# Altium PCB IMX6WBED.PcbDoc (part 4 of 10)
Units mil, origin at the board's own origin, x right, y up, seen from the top; angles counter-clockwise.
Board outline 3318.23 x 4815.16 mil, 6 copper layers (Top Layer, L2_GND_1, L3_INT_1, L6_INT_2, L7_PWR_2, Bottom Layer), stack 27.7 mil thick; 504 components, 400 nets, 2357 pads, 1199 vias.
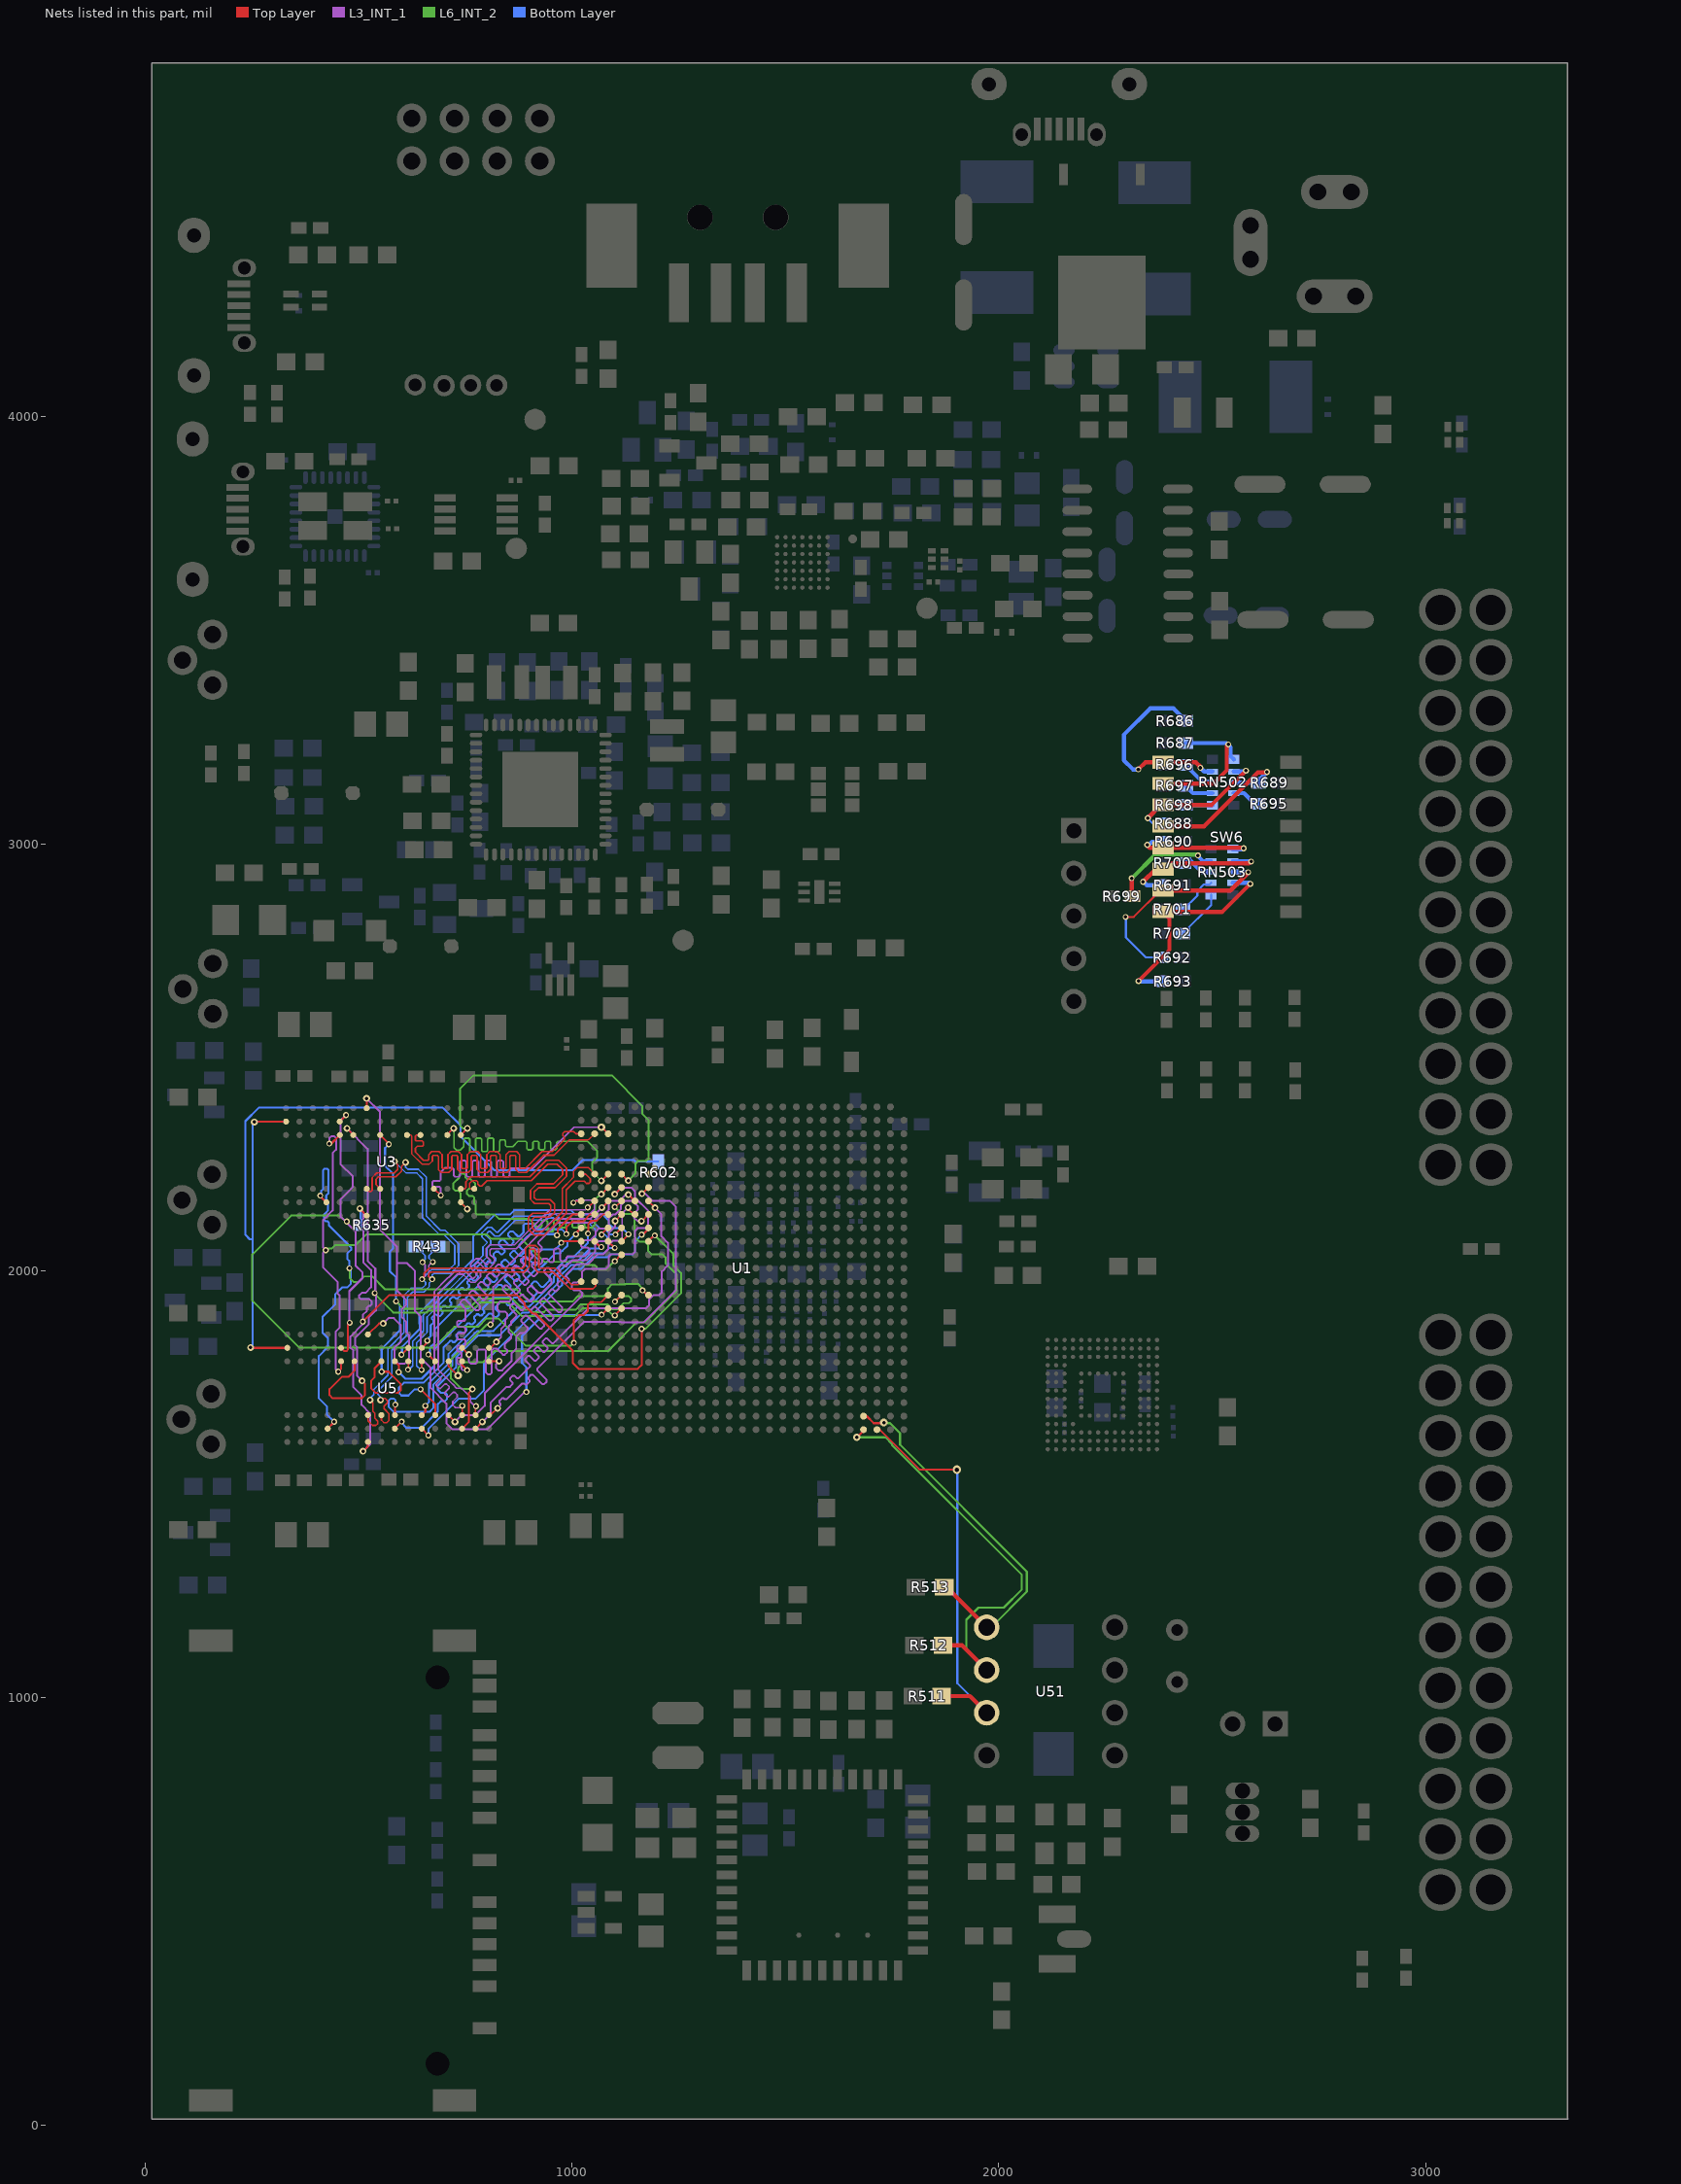
[diagram p8: the nets of this part, all layers, seen from the top]

## Via types
v1: diameter 14, hole 8, Top Layer to Bottom Layer, 296 vias
v2: diameter 14, hole 8, Top Layer to Bottom Layer, tented both sides, 244 vias
v3: diameter 20, hole 10, Top Layer to Bottom Layer, 221 vias
v4: diameter 20, hole 10, Top Layer to Bottom Layer, tented both sides, 112 vias
v5: diameter 18, hole 8, Top Layer to Bottom Layer, tented both sides, 74 vias
v6: diameter 12, hole 6, Top Layer to Bottom Layer, tented both sides, 60 vias
v7: diameter 16, hole 8, Top Layer to Bottom Layer, 59 vias
v8: diameter 30, hole 15, Top Layer to Bottom Layer, 33 vias
v9: diameter 40, hole 20, Top Layer to Bottom Layer, 16 vias
v10: diameter 30, hole 15, Top Layer to Bottom Layer, tented both sides, 16 vias
v11: diameter 18, hole 8, Top Layer to Bottom Layer, 16 vias
v12: diameter 12, hole 6, Top Layer to Bottom Layer, 13 vias
v13: diameter 16, hole 8, Top Layer to Bottom Layer, tented both sides, 8 vias
v14: diameter 80, hole 40, Top Layer to Bottom Layer, 5 vias
v15: diameter 14, hole 6, Top Layer to Bottom Layer, tented both sides, 4 vias
v16: diameter 50, hole 30, Top Layer to Bottom Layer, 3 vias
v17: diameter 16, hole 10, Top Layer to Bottom Layer, 3 vias
v18: diameter 25, hole 15, Top Layer to Bottom Layer, tented both sides, 3 vias
v19: diameter 35, hole 20, Top Layer to Bottom Layer, tented both sides, 3 vias
v20: diameter 10, hole 6, Top Layer to Bottom Layer, 3 vias
v21: diameter 18, hole 10, Top Layer to Bottom Layer, tented both sides, 2 vias
v22: diameter 80, hole 45, Top Layer to Bottom Layer, 1 vias
v23: diameter 40, hole 20, Top Layer to Bottom Layer, tented both sides, 1 vias
v24: diameter 11, hole 6, Top Layer to Bottom Layer, tented both sides, 1 vias
v25: diameter 13, hole 6, Top Layer to Bottom Layer, tented both sides, 1 vias
v26: diameter 14, hole 6, Top Layer to Bottom Layer, 1 vias

## Nets (pads, with @x,y where several pads share a name; then routed paths per layer and width w, separated by ;. In a path a pad name is that pad's centre, name@x,y a point inside that pad or via, vN(x,y) a via of type N, cw(c..) or ccw(c..) an arc to the next point about the centre after c; other vN are vias at no path point) (continued)
DRAM_D14: U1.AB6 U3.C3 | length 827.3
  Top Layer w4.5: U3.C3@739.48,2317.91 739.48,2318.16 v7(754.84,2333.52) ; U1.AB6@1116.05,2226.42 v7@1129.18,2213.29
  L6_INT_2 w4.5: v7@754.58,2333.65 744.24,2333.65 738.09,2339.8 738.09,2426.69 768.82,2457.42 1093.18,2457.42 1164.4,2386.2 1164.4,2367.63 1179.54,2352.49 1179.54,2262.48 1174.22,2257.16 1155.33,2257.16 1148.61,2250.44 1148.61,2227.95 v7(1131.71,2211.05)
DRAM_D15: U1.AC7 U3.C8 | length 827.3
  Top Layer w4.5: U3.C8@739.48,2160.43 739.48,2160.05 v7(754.73,2144.8) ; v7@1069.18,2179.55 U1.AC7@1084.56,2194.92
  L6_INT_2 w4.5: v7(754.73,2144.8) 738.79,2160.74 738.79,2182.45 733.55,2187.69 726.25,2187.69 721.6,2192.34 721.6,2204.08 735.55,2218.03 735.55,2223.08 740.27,2227.8 746.33,2227.8 750.58,2223.55 750.58,2218.82 754.56,2214.84 762.19,2214.84 773.41,2203.62 773.41,2196.28 769.09,2191.96 757.86,2191.96 753.92,2188.02 753.92,2179.86 758.32,2175.46 766.28,2175.46 771.1,2170.64 771.1,2158.01 774.07,2155.04 774.07,2134.72 777.11,2131.68 810.88,2131.68 ; 810.9,2131.7 818.88,2131.7 829.36,2121.22 899.54,2121.22 919.61,2101.15 925.63,2101.15 929.16,2104.68 929.16,2114.47 933.01,2118.32 939.04,2118.32 942.73,2114.63 942.73,2095.05 942.54,2094.86 945.44,2091.96 954.14,2091.96 957.04,2094.86 957.04,2116.07 959.94,2118.97 968.64,2118.97 971.54,2116.07 971.54,2104.05 974.44,2101.15 983.14,2101.15 986.04,2104.05 986.04,2120.93 988.94,2123.83 997.64,2123.83 1000.54,2120.93 1000.54,2104.05 1003.44,2101.15 1012.14,2101.15 1015.04,2104.05 1015.04,2121.18 1017.94,2124.08 1026.64,2124.08 1029.54,2121.18 1029.54,2104.05 1032.44,2101.15 1046.59,2101.15 1053.97,2108.53 1053.97,2115.23 1061.36,2122.62 1061.36,2132.84 1053.97,2140.23 1053.97,2166.61 1066.68,2179.32 v7(1068.78,2179.32)
DRAM_D16: U1.AB7 U5.D7 | length 960.9
  Top Layer w4.5: U5.D7@710.98,1661.92 710.98,1661.14 v7(725.82,1646.3) ; v7@1100.43,2179.3 U1.AB7@1116.05,2194.92
  L3_INT_1 w4.5: v7(725.82,1646.3) 741.48,1661.96 773.83,1661.96 795.36,1683.5 795.36,1712.95 1023.17,1940.76 1023.17,1949.02 1017.39,1954.8 1003.85,1954.8 999.45,1959.2 999.45,1968.57 1003.87,1972.99 1012.46,1972.99 1023.06,1983.59 1023.06,1996.63 1030.51,2004.08 1078.23,2004.08 1086.39,2012.24 1086.39,2033.26 1092.2,2039.07 1142.37,2039.07 1147.8,2044.5 1147.8,2070 ; v7(1099.99,2179.51) 1115.11,2194.63 1139.1,2194.63 1147.47,2186.26 1147.47,2171.23 1178.51,2140.19 1178.51,2105.09 1173.35,2099.93 1153.95,2099.93 1147.77,2093.75 1147.77,2071.01 1147.9,2070.88
DRAM_D17: U1.AA8 U5.C8 | length 960.6
  Top Layer w4.5: U5.C8@742.48,1630.43 758.46,1646.41 758.46,1714.72 v7(766.66,1722.92) ; v7@1132.43,2178.55 U1.AA8@1147.55,2163.43
  L3_INT_1 w4.5: v1@808.11,1874.49 815.69,1882.07 815.69,1961.77 845.23,1991.31 849.34,1991.31 855.06,1985.59 859.16,1985.59 865.31,1991.74 865.31,1995.84 859.59,2001.57 859.59,2005.67 865.74,2011.82 869.84,2011.82 876.62,2005.05 880.72,2005.05 886.87,2011.2 886.87,2015.3 880.09,2022.07 880.09,2026.17 886.25,2032.33 890.35,2032.33 897.12,2025.55 901.22,2025.55 907.37,2031.7 907.37,2035.81 900.6,2042.58 900.6,2046.68 906.75,2052.83 910.85,2052.83 919.17,2044.52 924.39,2044.52 929.25,2049.38 929.25,2054.94 921.11,2063.09 921.11,2067.19 966.68,2112.76 1047.38,2112.76 1067.72,2133.1 1075.89,2133.1 1085.77,2142.98 1085.77,2158.43 1090.9,2163.56 1110.17,2163.56 1125.04,2178.43 v7(1131.93,2178.43)
  L6_INT_2 w4.5: v7(766.66,1722.92) 741.44,1722.92 716.69,1747.67 716.69,1792.53 800.35,1873.88 v1@812.08,1873.88
  other v1: 808.76,1873.91
DRAM_D18: U1.AB9 U5.C2 | length 961.9
  Top Layer w4.5: U5.C2@742.48,1819.4 v7@758.12,1803.76 ; v7@1100.98,2116.86 U1.AB9@1116.05,2131.93
  L3_INT_1 w4.5: v7(758.47,1803.76) 758.47,1786.88 762.49,1782.86 773.82,1782.86 778.01,1787.05 778.01,1812.11 781.16,1815.26 795.3,1815.26 798.43,1812.13 798.43,1761.62 802.46,1757.59 808.74,1757.59 812.14,1760.99 812.14,1797.39 ; 812.18,1797.42 812.18,1808.35 812.22,1808.39 812.22,1814.1 815.78,1817.66 823.46,1817.66 827.94,1813.18 838.07,1803.05 842.17,1803.05 848.32,1809.2 848.32,1813.31 841.98,1819.65 841.98,1827.22 857.31,1842.55 857.31,1850.96 851.93,1856.34 851.93,1869.17 857.31,1874.55 857.31,1881.06 869.75,1893.5 869.75,1897.6 854.59,1912.77 854.59,1916.87 860.74,1923.02 864.84,1923.02 880,1907.86 884.11,1907.86 890.26,1914.01 890.26,1918.11 875.09,1933.27 875.09,1937.37 881.25,1943.53 885.35,1943.53 900.51,1928.36 904.61,1928.36 910.76,1934.51 910.76,1938.61 895.6,1953.78 895.6,1957.88 901.75,1964.03 905.85,1964.03 921.02,1948.87 929.41,1948.87 951.78,1971.24 951.78,1979.63 934.66,1996.74 934.66,2000.84 940.82,2006.99 944.92,2006.99 962.03,1989.88 966.13,1989.88 972.28,1996.03 972.28,2000.13 968.89,2003.53 968.89,2007.63 975.04,2013.78 979.14,2013.78 982.53,2010.39 986.64,2010.39 1000.7,2024.45 1033.92,2024.45 1054.72,2045.25 1054.72,2061.7 1062.39,2069.37 1078.84,2069.37 1081.36,2071.89 ; 1081.4,2071.89 1086.16,2076.65 1086.16,2089.11 1100.9,2103.85 v7(1100.9,2116.46)
DRAM_D19: U1.Y9 U5.A2 | length 960.6
  Top Layer w4.5: U5.A2@805.47,1819.4 808.75,1819.4 v7(822.74,1833.39) ; v7@1164.03,2116.92 U1.Y9@1179.05,2131.93
  L3_INT_1 w4.5: v7(822.74,1833.39) 833.96,1844.61 833.96,1863.89 843.75,1873.68 843.75,1884.94 848.47,1889.66 848.47,1899.57 843.92,1904.12 831.11,1904.12 825.68,1909.55 825.68,1921.94 832.15,1928.41 853.4,1928.41 857.1,1932.11 857.1,1936.21 837.51,1955.8 837.51,1959.9 843.66,1966.06 847.76,1966.06 859.85,1953.96 867.36,1946.46 871.46,1946.46 877.61,1952.62 877.61,1956.72 863.77,1970.56 863.77,1974.66 869.92,1980.81 874.02,1980.81 880.36,1974.47 887.86,1966.97 891.96,1966.97 898.12,1973.12 898.12,1977.22 885.32,1990.02 885.32,1994.12 891.47,2000.27 895.57,2000.27 900.87,1994.98 908.37,1987.48 912.47,1987.48 918.62,1993.63 918.62,1997.73 905.83,2010.52 905.83,2014.62 911.98,2020.78 916.08,2020.78 921.37,2015.48 925.95,2015.48 929.61,2019.14 929.61,2024.87 933.24,2028.5 940.51,2028.5 948.17,2020.84 955.02,2020.84 957.82,2023.64 957.82,2049.09 960.72,2051.99 969.42,2051.99 972.32,2049.09 972.32,2025.68 975.22,2022.78 983.92,2022.78 986.82,2025.68 986.82,2030.55 989.72,2033.45 1030.19,2033.45 1041,2044.25 1041,2049.95 1036.5,2054.45 1024.64,2054.45 1021.16,2057.93 1021.16,2067.83 1024.75,2071.42 1042.71,2071.42 1055.48,2084.2 1055.48,2091.9 1062.84,2099.26 1081.64,2099.26 1085.8,2103.42 1085.8,2122.21 1095.45,2131.87 1101.8,2131.87 1114.74,2144.82 1114.74,2153.7 1124.43,2163.39 1141.64,2163.39 1149.17,2155.86 1154.42,2150.6 1154.42,2143.28 1144.92,2133.78 1144.92,2124.86 1153.77,2116.01 v7(1162.81,2116.01)
DRAM_D20: U1.Y7 U5.A7 | length 961.4
  Top Layer w4.5: U5.A7@805.47,1661.92 809.36,1661.92 v7(825.63,1678.19) ; v7@1164.15,2180.61 1178.46,2194.92 U1.Y7@1179.05,2194.92
  L3_INT_1 w4.5: v7@825.37,1678.19 v7@825.5,1678.32 ; v7(825.63,1678.19) 832.19,1684.75 832.19,1688.85 829.93,1691.11 829.93,1695.22 836.08,1701.37 840.18,1701.37 842.44,1699.11 846.55,1699.11 883.46,1736.02 887.56,1736.02 889.82,1733.75 893.92,1733.75 900.07,1739.91 900.07,1744.01 897.81,1746.27 897.81,1750.37 903.96,1756.52 908.06,1756.52 930.39,1734.2 934.49,1734.2 940.64,1740.35 940.64,1744.45 918.32,1766.78 918.32,1770.88 1027.03,1879.6 1027.98,1880.54 1114.33,1880.54 1115.28,1879.59 1155.48,1879.59 1155.54,1879.53 1168.5,1879.53 1243.61,1954.64 1243.61,2149.81 1229.81,2163.61 1205.31,2163.61 1205.15,2163.77 1188.11,2163.77 1170.67,2181.21 v7@1162.01,2181.21
  other v7: 1163.47,2180.75
DRAM_D21: U1.Y8 U5.B8 | length 960.5
  Top Layer w4.5: U5.B8@773.97,1630.43 774.63,1630.43 v7(790.07,1645.87) ; U1.Y8@1179.05,2163.43 1179.05,2163.01 v7@1193.76,2148.3
  L3_INT_1 w4.5: v7(790.07,1645.87) v7@790.8,1646.6 ; v7@790.8,1643.36 v7@790.8,1646.6 ; v7(1194.36,2147.58) 1209.27,2132.67 1209.27,2081 1224.83,2065.44 1224.83,2012.79 1210.44,1998.4 1210.53,1998.31 1210.53,1949.55 1204.02,1943.04 1191.18,1943.04 1181.04,1932.9 1181.04,1920.06 1172.92,1911.94 1038.23,1911.94 956.8,1830.51 952.7,1830.51 941.81,1841.39 937.71,1841.39 931.56,1835.24 931.56,1831.14 942.45,1820.26 942.45,1816.16 936.29,1810 932.19,1810 921.31,1820.89 917.21,1820.89 911.06,1814.74 911.06,1810.63 921.94,1799.75 921.94,1795.65 915.79,1789.5 911.69,1789.5 900.8,1800.38 896.7,1800.38 890.55,1794.23 890.55,1790.13 901.43,1779.24 901.43,1775.14 874.78,1748.49 870.67,1748.49 864.94,1754.22 860.84,1754.22 854.69,1748.07 854.69,1743.97 860.42,1738.23 860.42,1734.13 854.54,1728.25 846.32,1728.25 809.06,1690.99 809.06,1664.86 v7@790.8,1646.6
DRAM_D22: U1.AC8 U5.C3 | length 960.2
  Top Layer w4.5: U5.C3@742.48,1787.91 742.48,1778.99 v1(754.17,1767.3) ; v7@1070.13,2147.01 1084.56,2161.44 U1.AC8@1084.56,2163.43
  L3_INT_1 w4.5: v1@750.96,1767.05 743.59,1767.05 740.66,1769.98 740.66,1778.48 737.76,1781.38 733.56,1781.38 730.66,1784.28 730.66,1792.98 733.56,1795.88 737.76,1795.88 740.66,1798.78 740.66,1807.48 737.76,1810.38 733.56,1810.38 730.66,1813.28 730.66,1821.98 733.56,1824.88 747.76,1824.88 750.66,1827.78 750.66,1836.48 747.76,1839.38 733.56,1839.38 730.66,1842.28 730.66,1850.98 733.56,1853.88 747.76,1853.88 750.66,1856.78 750.66,1865.48 747.76,1868.38 733.56,1868.38 730.66,1871.28 730.66,1879.98 733.56,1882.88 747.76,1882.88 750.66,1885.78 750.66,1910.5 745.7,1915.47 738.59,1922.57 738.59,1926.67 744.74,1932.82 748.84,1932.82 759.65,1922.01 770.46,1911.2 774.55,1907.12 780.03,1907.12 784.61,1911.7 784.61,1917.57 759.1,1943.08 759.1,1947.18 765.25,1953.33 769.35,1953.33 780.16,1942.52 790.97,1931.71 795.07,1931.71 801.22,1937.86 801.22,1941.96 779.6,1963.58 779.6,1967.68 785.76,1973.84 789.86,1973.84 798.62,1965.08 802.72,1965.08 808.87,1971.23 808.87,1975.33 800.11,1984.09 800.11,1988.19 806.26,1994.34 810.36,1994.34 819.12,1985.58 823.22,1985.58 829.38,1991.74 829.38,1995.84 820.62,2004.6 820.62,2008.7 826.77,2014.85 830.87,2014.85 839.63,2006.09 843.73,2006.09 959.4,2121.76 1043.03,2121.76 1064.49,2143.22 1069.94,2143.22 v7(1069.94,2148.01)
DRAM_D23: U1.AA9 U5.A3 | length 960.7
  Top Layer w4.5: U5.A3@805.47,1787.91 828.76,1787.91 v7(829.05,1788.2) ; v7@1130.11,2146.5 1144.68,2131.93 U1.AA9@1147.55,2131.93
  L3_INT_1 w4.5: v7@827.14,1788.14 827.67,1788.14 v7@828.39,1788.86 ; v7(829.05,1788.2) 821.81,1780.96 821.81,1772.34 827.41,1766.74 836.27,1766.74 858.79,1789.26 858.79,1806.95 869.21,1817.37 869.21,1845.58 869.43,1845.58 877.44,1853.59 887.63,1853.59 895.83,1861.79 895.83,1867.44 880.88,1882.39 880.88,1885.92 889.73,1894.77 893.84,1894.77 910.95,1877.66 924,1864.61 928.75,1864.61 934.3,1870.16 934.3,1874.82 904.09,1905.03 904.09,1909.13 910.24,1915.28 914.34,1915.28 945.71,1883.91 951.87,1883.91 956.19,1888.23 956.19,1893.94 924.59,1925.53 924.59,1929.63 930.75,1935.79 934.85,1935.79 967.38,1903.25 972.94,1903.25 977.18,1907.49 977.18,1913.96 945.1,1946.04 945.1,1950.14 951.25,1956.29 955.35,1956.29 959.16,1952.48 963.27,1952.48 969.42,1958.63 969.42,1962.74 965.61,1966.55 965.61,1970.65 971.76,1976.8 975.86,1976.8 982.18,1970.48 986.28,1970.48 992.43,1976.63 992.43,1980.73 986.11,1987.05 986.11,1991.15 1010.41,2015.45 1037.67,2015.45 1060.86,2038.64 1073.34,2038.64 1084.96,2050.26 1084.96,2059.71 1095.21,2069.96 1112.47,2069.96 1117.33,2074.82 1117.33,2109.77 ; 1117.35,2109.79 1117.35,2134.26 v7(1131.11,2148.02)
DRAM_D24: U1.AE9 U5.E3 | length 806.3
  Top Layer w4.7: v1(663.57,1803.69) 663.7,1803.69 U5.E3@679.49,1787.91 ; v1(964.86,2083.24) 964.86,2079.66 967.79,2082.59 966.51,2082.59 966.51,2096.8 1001.65,2131.93 U1.AE9@1021.57,2131.93
  Bottom Layer w4.7: v1@665.21,1805.13 665.85,1805.13 667.05,1806.33 667.05,1819.91 678.18,1831.04 678.18,1862.79 703.28,1887.89 736.93,1921.54 741.09,1921.54 751.71,1910.93 755.86,1910.93 762.1,1917.16 762.1,1921.32 751.49,1931.93 751.49,1936.09 757.72,1942.33 761.88,1942.33 772.5,1931.71 776.65,1931.71 782.89,1937.95 782.89,1942.11 772.27,1952.72 772.27,1956.88 778.51,1963.12 782.67,1963.12 793.28,1952.5 797.44,1952.5 803.68,1958.74 803.68,1962.9 793.06,1973.51 793.06,1977.67 799.3,1983.91 803.46,1983.91 814.07,1973.29 818.23,1973.29 824.47,1979.53 824.47,1983.69 813.85,1994.3 813.85,1998.46 820.09,2004.7 824.25,2004.7 834.86,1994.08 839.02,1994.08 845.26,2000.32 845.26,2004.48 834.64,2015.09 834.64,2019.25 840.88,2025.48 845.04,2025.48 855.65,2014.87 859.81,2014.87 866.05,2021.11 866.05,2025.26 855.43,2035.88 855.43,2040.04 861.67,2046.27 865.82,2046.27 876.44,2035.66 880.6,2035.66 886.83,2041.9 886.83,2046.05 876.22,2056.67 876.22,2060.83 884.53,2069.14 894.93,2079.54 900.13,2084.73 901.2,2085.81 960.68,2085.81 v1@966.68,2079.81
DRAM_D25: U1.Y10 U5.F8 | length 806.3
  Top Layer w4.7: U5.F8@647.99,1630.43 v1@663.6,1614.82 ; v1@1165.27,2084.04 1179.05,2097.82 U1.Y10@1179.05,2100.44
  Bottom Layer w4.5: v1(663.6,1614.42) 663.6,1629.67 734.2,1700.27 773.32,1700.27 793.94,1720.89 793.94,1783.62 955.07,1944.75 955.07,1944.89 976.35,1966.17 976.35,1978.86 1001.37,2003.88 1020.9,2003.88 1048.96,2031.94 1083.46,2031.94 1090.34,2038.82 1142.59,2038.82 1147.85,2044.08 1147.85,2069.11 v1(1163.18,2084.44)
DRAM_D26: U1.AE11 U5.H3 | length 806.8
  Top Layer w4.7: U5.H3@585,1787.91 593.92,1778.99 v1(593.92,1762.37) ; v1@970.9,2063.86 974.95,2063.86 980.03,2068.94 U1.AE11@1021.57,2068.94
  Bottom Layer w4.7: v1@594.39,1762.84 609.99,1747.24 647.82,1747.24 677.42,1776.84 677.42,1817.16 690.03,1829.77 ; 690.03,1829.78 710.46,1850.21 ; 710.5,1850.21 721.09,1860.8 721.17,1860.8 826.87,1966.5 834.55,1966.5 845.41,1955.64 849.57,1955.64 855.81,1961.88 855.81,1966.04 842.58,1979.26 842.58,1983.41 848.82,1989.65 852.98,1989.65 866.2,1976.43 870.36,1976.43 876.59,1982.67 876.59,1986.83 863.37,2000.05 863.37,2004.2 869.61,2010.44 873.77,2010.44 886.99,1997.22 891.15,1997.22 897.38,2003.46 897.38,2007.61 884.16,2020.83 884.16,2024.99 890.4,2031.23 894.56,2031.23 911.98,2013.81 916.14,2013.81 922.37,2020.05 922.37,2024.2 904.95,2041.62 904.95,2045.78 909.44,2050.27 961.36,2050.27 974.95,2063.86 v1@970.9,2063.86
  other v1: 974.83,2065.66
DRAM_D27: U1.AB11 U5.G2 | length 806.7
  Top Layer w4.7: v1@600.72,1803.63 U5.G2@616.49,1819.4 ; U1.AB11@1116.05,2068.94 v1@1131.78,2084.67
  Bottom Layer w4.7: v1@601.73,1803.63 601.73,1821.96 642.9,1863.13 642.9,1875.54 ; 642.49,1888.71 642.49,1901.12 768.26,2026.89 768.26,2080.18 819.59,2131.51 854.06,2131.51 864.24,2141.69 997.83,2141.69 1007.26,2132.26 1031.28,2132.26 1031.37,2132.17 1071.39,2132.17 1077.47,2126.09 1077.53,2126.09 1084.76,2118.86 1084.76,2118.8 1085.61,2117.95 1085.61,2110.75 1096.28,2100.08 1117.61,2100.08 v1(1132.12,2085.57) ; 642.58,1875.86 642.58,1888.62
  other v1: 600.13,1803.63
DRAM_D28: U1.AC9 U5.F7 | length 806.3
  Top Layer w3: U1.AC9@1083.28,2131.93 U1.AC9@1084.56,2131.93
  Top Layer w3.8: 1054.38,2117.08 1057.88,2117.08 1072.73,2131.93 U1.AC9@1083.28,2131.93
  Top Layer w4.7: U5.F7@647.99,1661.92 656.33,1670.26 v1(656.33,1683.77) ; v1@1038.06,2089.57 1038.06,2110.04 1045.1,2117.08 1054.38,2117.08
  Bottom Layer w4.7: v1(656.33,1683.77) 664.64,1692.08 664.64,1735.98 710.15,1781.49 710.15,1804.54 776.14,1870.53 776.58,1870.53 805.96,1899.9 810.11,1899.9 818.87,1891.15 823.03,1891.15 829.27,1897.38 829.27,1901.54 820.51,1910.3 820.51,1914.46 834.02,1927.97 843.89,1927.97 846.83,1925.03 846.83,1921.51 849.77,1918.57 858.59,1918.57 861.53,1921.51 861.53,1934.43 864.47,1937.37 873.29,1937.37 876.23,1934.43 876.23,1930.91 879.17,1927.97 898.28,1927.97 917.89,1947.58 917.89,1951.74 905.12,1964.51 905.12,1968.66 911.36,1974.9 915.52,1974.9 928.28,1962.13 932.44,1962.13 947.75,1977.44 947.75,1989.16 989.96,2031.37 1002.99,2031.37 1016,2044.38 1016,2044.44 1037.37,2065.81 v1(1037.37,2087.18) ; v1@657.08,1682.59 v1@657.29,1682.81
DRAM_D29: U1.AD9 U5.F2 | length 806
  Top Layer w4.5: v1(986.86,2086.1) 986.86,2101.42 1001.8,2116.36 1027.1,2116.36 1042.67,2131.93 U1.AD9@1053.06,2131.93
  Top Layer w4.7: U5.F2@647.99,1819.4 647.99,1819.63 v1@664.33,1835.97
  Bottom Layer w4.7: v1@665.34,1836.43 665.34,1843.46 668.98,1847.1 668.98,1872.28 675.66,1878.96 675.66,1883.12 671.93,1886.85 671.93,1891 678.17,1897.24 682.33,1897.24 686.05,1893.51 690.21,1893.51 696.45,1899.75 696.45,1903.91 692.72,1907.63 692.72,1911.79 698.96,1918.03 703.11,1918.03 706.84,1914.3 711,1914.3 717.24,1920.54 717.24,1924.7 713.51,1928.42 713.51,1932.58 719.75,1938.82 723.9,1938.82 727.63,1935.09 731.79,1935.09 738.03,1941.33 738.03,1945.48 734.3,1949.21 734.3,1953.37 740.54,1959.61 744.69,1959.61 748.42,1955.88 752.58,1955.88 758.82,1962.12 758.82,1966.27 755.09,1970 755.09,1974.16 761.32,1980.4 765.48,1980.4 769.21,1976.67 773.37,1976.67 779.6,1982.9 779.6,1987.06 775.88,1990.79 775.88,1994.95 782.11,2001.18 786.27,2001.18 790,1997.46 794.16,1997.46 800.39,2003.69 800.39,2007.85 796.66,2011.58 796.66,2015.74 802.9,2021.97 807.06,2021.97 810.79,2018.25 814.95,2018.25 821.18,2024.48 821.18,2028.64 815.86,2033.96 815.86,2038.95 821.62,2044.71 827.13,2044.71 832.97,2038.87 837.01,2038.87 842.08,2043.94 842.08,2047.67 828.36,2061.39 828.36,2066.64 834.4,2072.68 839.45,2072.68 848.58,2063.55 848.64,2063.55 852.37,2059.82 856.52,2059.82 862.76,2066.06 862.76,2070.22 859.03,2073.95 850.18,2082.8 850.18,2087.04 855.4,2092.26 861.51,2092.26 873.15,2080.61 877.31,2080.61 886.32,2089.62 886.32,2106.2 890.48,2110.35 911.16,2110.35 914.3,2107.21 914.3,2101.94 919.06,2097.18 975.78,2097.18 v1(986.86,2086.1)
  other v1: 660.84,1836.1
DRAM_D30: U1.AD11 U5.H7 | length 806.3
  Top Layer w4.7: U5.H7@585,1661.92 585,1685.46 v1(586.08,1686.54)
  Top Layer w5: U1.AD11@1053.06,2068.94 v1@1067.64,2054.37
  Bottom Layer w4.7: v1(586.08,1686.54) 586.08,1697.23 582.45,1700.86 575.56,1700.86 570.13,1695.43 570.13,1681.45 582.09,1669.49 666.09,1669.49 674.96,1678.36 674.96,1733.29 719.35,1777.68 719.35,1800.73 777.77,1859.15 782.57,1859.15 782.71,1859.01 815.9,1859.01 830.54,1873.65 ; 830.56,1873.65 872.19,1915.28 898.34,1915.28 901.83,1918.77 902.09,1918.77 956.95,1973.63 956.95,1985.34 993.98,2022.37 1012.41,2022.37 1042.17,2052.13 1065.4,2052.13 v1(1068.87,2055.6)
DRAM_D31: U1.AC11 U5.H8 | length 806.9
  Top Layer w4.7: U5.H8@585,1630.43 585,1630.85 v1(600.93,1646.78) ; U1.AC11@1084.56,2068.94 v1@1098.95,2054.55
  Bottom Layer w4.7: v1@600.31,1644.18 612.61,1631.88 646.93,1631.88 685.3,1670.26 685.3,1687.31 692.55,1694.56 695.61,1694.56 ; 695.63,1694.58 702.13,1694.58 707.44,1699.89 707.44,1709.6 702.92,1714.12 693.02,1714.12 685.3,1721.84 685.3,1730.62 728.55,1773.87 728.55,1796.92 780.45,1848.82 787,1848.82 ; 787.14,1848.96 830.3,1848.96 883.09,1901.75 896.87,1901.75 ; 898.08,1901.75 966.15,1969.82 966.15,1981.53 997.79,2013.17 1016.22,2013.17 1044.1,2041.05 1075.44,2041.05 1088,2053.61 v1(1100.08,2053.61)
DRAM_DQM0: U1.AC3 U3.E7 | length 856.2
  Top Layer w4.5: U3.E7@677.15,2191.92 v1(692.63,2176.44) ; v11@1071.37,2334.1 U1.AC3@1084.56,2320.91
  L3_INT_1 w4.5: v1@692.45,2176.14 v1@692.45,2176.44 ; v1(692.63,2176.44) 692.63,2193.34 689.73,2196.24 675.95,2196.24 673.05,2199.14 673.05,2207.84 675.95,2210.74 689.73,2210.74 692.63,2213.64 692.63,2230.88 703.24,2241.49 718.39,2241.49 723.14,2236.74 723.14,2222.96 726.04,2220.06 734.74,2220.06 737.64,2222.96 737.64,2254.95 740.54,2257.85 749.24,2257.85 752.14,2254.95 752.14,2222.96 755.04,2220.06 763.74,2220.06 766.64,2222.96 766.64,2254.95 769.54,2257.85 778.24,2257.85 781.14,2254.95 781.14,2222.96 784.04,2220.06 792.74,2220.06 795.64,2222.96 795.64,2254.95 798.54,2257.85 807.24,2257.85 810.14,2254.95 810.14,2222.96 813.04,2220.06 821.74,2220.06 824.64,2222.96 824.64,2254.95 827.54,2257.85 836.24,2257.85 839.14,2254.95 839.14,2222.96 842.04,2220.06 850.74,2220.06 853.64,2222.96 853.64,2236.74 856.54,2239.64 907.71,2239.64 1004.19,2336.12 v11(1068.61,2336.08) v11(1068.61,2336.08)
DRAM_DQM1: U1.AC6 U3.D3 | length 827.4
  Top Layer w4: U3.D3@707.98,2317.91 707.98,2318.92 v7(722.83,2333.77) ; v7@1068.29,2209.59 1084.56,2225.86 U1.AC6@1084.56,2226.42
  L6_INT_2 w4: v7@723.62,2331.39 723.62,2287.95 729.17,2282.4 738.23,2282.4 746.28,2290.45 746.28,2307.98 749.08,2310.78 757.48,2310.78 760.28,2307.98 760.28,2280.8 763.08,2278 771.48,2278 774.28,2280.8 774.28,2307.98 777.08,2310.78 785.48,2310.78 788.28,2307.98 788.28,2281.94 791.08,2279.14 799.48,2279.14 802.28,2281.94 802.28,2307.98 805.08,2310.78 813.48,2310.78 816.28,2307.98 816.28,2281.94 819.08,2279.14 827.48,2279.14 830.28,2281.94 830.28,2303.54 833.08,2306.34 841.48,2306.34 844.28,2303.54 844.28,2293.58 847.08,2290.78 860.93,2290.78 873.32,2303.17 891.52,2303.17 894.32,2300.37 894.32,2285.97 897.12,2283.17 905.52,2283.17 908.32,2285.97 908.32,2300.37 911.12,2303.17 919.52,2303.17 922.32,2300.37 922.32,2285.97 925.12,2283.17 933.52,2283.17 936.32,2285.97 936.32,2300.37 939.12,2303.17 947.52,2303.17 950.32,2300.37 950.32,2285.97 953.12,2283.17 961.52,2283.17 964.32,2285.97 964.32,2300.37 967.12,2303.17 1036.88,2303.17 1058.53,2281.52 1058.53,2264.72 1047.62,2253.81 1047.62,2231.76 v7(1068.93,2210.41)
DRAM_DQM2: U1.AB8 U5.D3 | length 960.6
  Top Layer w4.5: U5.D3@710.98,1787.91 710.98,1776.43 v11(732.92,1754.49) ; v1@1101.7,2149.07 U1.AB8@1116.05,2163.43
  L6_INT_2 w4.5: v11(732.92,1754.49) 732.92,1772.18 746.63,1785.89 791.52,1785.89 817.67,1812.04 890.96,1812.04 ; 890.99,1812.01 1043.24,1812.01 ; 1043.25,1812.02 1084,1812.02 1150.81,1878.83 1170.58,1878.83 1180.84,1889.09 ; v1(1099.75,2149.58) 1116.54,2132.79 1139.39,2132.79 1146.67,2125.51 1146.67,2078.91 1157.89,2067.69 1170.85,2067.69 1177.88,2060.66 1177.88,2046.67 1185.77,2038.78 1211.33,2038.78 1218.88,2031.23 1218.88,2017.63 1245.36,1991.15 1245.36,1953.2 1231.88,1939.72 1209.12,1916.97 1208.75,1916.97 1180.87,1889.09
DRAM_DQM3: U1.AE10 U5.E7 | length 806.4
  Top Layer w4.7: v1(645.46,1722.24) 679.49,1688.21 U5.E7@679.49,1661.92 U5.E7@679.71,1661.92
  Top Layer w6: v1@1007.23,2086.1 U1.AE10@1021.57,2100.44
  Bottom Layer w4.7: v1(645.46,1722.24) 631.39,1722.24 617,1707.85 600.65,1707.85 595,1713.5 595,1726.92 605.92,1737.84 652.19,1737.84 698.89,1784.54 698.89,1820.08 714.42,1835.61 718.58,1835.61 721.18,1833.02 725.34,1833.02 731.57,1839.25 731.57,1843.41 728.98,1846.01 728.98,1850.17 735.21,1856.4 739.37,1856.4 741.97,1853.81 746.12,1853.81 752.36,1860.04 752.36,1864.2 749.76,1866.8 749.76,1870.95 756,1877.19 760.16,1877.19 762.76,1874.59 766.91,1874.59 773.15,1880.83 773.15,1884.99 770.55,1887.59 770.55,1891.74 776.79,1897.98 780.95,1897.98 783.76,1895.16 787.92,1895.16 794.16,1901.4 794.16,1905.56 791.34,1908.37 791.34,1912.53 816.29,1937.48 849.14,1937.48 913.85,2002.19 922.16,2002.19 960.59,2040.62 971.28,2040.62 977.49,2046.83 989.65,2059.02 989.65,2067.57 1006.91,2084.83 1006.91,2086.1 1007.63,2085.38 v1(1009.13,2085.38)
DRAM_RAS_B: U1.AB15 U3.J3 U5.J3 | length 1497
  Top Layer w4.7: U3.J3@550.5,2317.91 v1@570.8,2297.61 ; U5.J3@553.5,1787.91 537.66,1772.07 537.66,1750.68 529.23,1742.25 529.23,1724.75 539.48,1714.5 592.89,1714.5 599.38,1720.99 599.38,1734.39 570.17,1763.6 v1(553.91,1763.6) ; v1@1101.87,1928.77 U1.AB15@1116.05,1942.96
  L6_INT_2 w4.5: v1(587.81,1928.3) 605.32,1910.79 655.42,1910.79 660.27,1915.64 762.04,1915.64 781.2,1934.8 860.5,1934.8 886.61,1908.69 902.65,1908.69 907.77,1903.57 934.49,1903.57 939.61,1908.69 1008.38,1908.69 1021.12,1921.43 1082.82,1921.43 1094.87,1909.38 1106.44,1909.38 1121.21,1924.15 1133.72,1924.15 1137.99,1928.42 1137.99,1935.59 1133.07,1940.51 1113.13,1940.51 v1(1100.48,1927.86)
  Bottom Layer w4.7: v1@554.02,1763.71 554.02,1817.28 596.48,1859.74 596.48,1919.63 v1(587.81,1928.3) ; v1(570.8,2296.16) 561.97,2287.33 561.97,2245.76 581.05,2226.68 581.05,2052.46 573.26,2044.67 573.26,1998.7 587.76,1984.2 v1(587.81,1928.3)
DRAM_RESET_B: R602.2 U1.Y6 U3.T2 U5.T2 | length 2070.8
  Top Layer w4.7: v7@246.05,1819.4 U5.T2@333.03,1819.4 ; v7@255.26,2349.4 U3.T2@330.03,2349.4 ; U1.Y6@1179.05,2226.42 1179.05,2226.48 v2(1193.47,2240.9)
  Bottom Layer w4.7: v7(247,1820.03) 245.53,1821.5 251.43,1827.4 251.43,2073.85 ; v7(255.73,2348.45) 251.43,2344.15 251.43,2073.85 ; R602.2@1202.47,2255.49 1201.71,2256.25 1148.07,2256.25 1145.03,2259.29 1025.44,2259.29 1001.92,2235.77 817.42,2235.77 739.19,2314 739.19,2340.07 697.19,2382.07 266.36,2382.07 234.63,2350.34 234.63,2084.24 245.02,2073.85 251.43,2073.85
DRAM_SDBA0: U1.AC15 U3.M2 U5.M2 | length 2053.3
  Top Layer w4.5: U3.M2@456.01,2349.4 470.69,2364.08 v1(470.69,2364.72) ; U5.M2@459.01,1819.4 466.43,1811.99 471.44,1811.99 474.72,1815.27 474.72,1873.17 v1@479.96,1878.41 ; v1(479.11,1878.41) v1@479.96,1878.41 ; 1049.42,1926.43 1068.03,1926.43 U1.AC15@1084.56,1942.96 ; v1@479.96,1878.41 480.38,1878.41 480.17,1878.62 v1@479.96,1878.41
  Top Layer w4.7: v1@1004.49,1831.12 1004.49,1884.53 1016.01,1896.05 1027.44,1896.05 1037.54,1906.15 1037.54,1920.85 1043.12,1926.43 1049.42,1926.43
  L3_INT_1 w4.5: v1@471.12,2364.29 v1(470.69,2364.72) 457.48,2351.51 457.48,2249.93 486.36,2221.05 486.36,2195.94 458.15,2167.73 458.15,2126.58 493.05,2091.68 493.05,2011.72 509.24,1995.53 509.24,1983.74 509.01,1983.51 509.01,1982.75 478.26,1952 v1@478.26,1882.83
  L6_INT_2 w4.5: v1(472.41,2115.43) 472.41,2113.75 471.54,2112.88 455.37,2129.05 342.13,2129.05 251.13,2038.05 251.13,1929.84 361.43,1819.54 675.38,1819.54 724.42,1868.58 779.97,1868.58 800.19,1888.8 827,1888.8 860.81,1854.99 860.99,1854.99 891.64,1824.34 997.04,1824.34 v1@1003.94,1831.24
  other v1: 1004.4,1831.24
DRAM_SDBA1: U1.Y15 U3.N8 U5.N8 | length 1606.9
  Top Layer w4.5: v1(1165.18,1954.16) 1176.38,1942.96 U1.Y15@1179.05,1942.96
  Top Layer w5: v1@410.85,2174.1 U3.N8@424.52,2160.43 ; U5.N8@427.52,1630.43 v1@442.92,1645.83
  L6_INT_2 w4.5: v1@479.31,2005.69 479.31,1982.94 489.03,1973.22 499.19,1973.22 512.7,1986.73 532.2,1986.73 562.49,1956.44 869.99,1956.44 897.98,1928.45 980.75,1928.45 ; 980.84,1928.54 1001.93,1928.54 1013.99,1940.6 1075.36,1940.6 1083.92,1949.16 1083.92,1958.46 1093.51,1968.05 1124.89,1968.05 1125.94,1969.1 1154.72,1969.1 1164.38,1959.44 v1@1164.38,1953.76
  Bottom Layer w4.7: v1(410.03,2176.09) 412.33,2178.39 412.33,2187.13 417.04,2191.84 417.04,2235.8 420.09,2238.85 426.31,2238.85 429.3,2235.86 429.3,2191.35 429.11,2191.16 429.11,2181.15 424.2,2176.24 424.2,2161.92 428.32,2157.8 428.32,2141.21 418.8,2131.69 418.8,2119.74 422.49,2116.05 427.01,2116.05 430.09,2112.97 430.09,2106.9 482.52,2054.47 482.52,2049.31 473.24,2040.03 473.24,2027.76 478.46,2022.54 v1(478.46,2005.69) 481.2,2002.95 481.2,1968.76 473.38,1960.94 461.14,1960.94 445.76,1945.56 445.76,1922.17 415.75,1892.16 415.75,1854.82 428.19,1842.38 428.19,1821.46 407.05,1800.32 407.05,1701.27 425.77,1682.55 425.77,1663.53 v1(442.92,1646.38)
DRAM_SDBA2: U1.AB12 U3.M3 U5.M3 | length 1434.1
  Top Layer w4.5: v1(452.47,1763.58) 459.01,1770.12 U5.M3@459.01,1787.91 ; v1(1100.37,2022.39) U1.AB12@1115.42,2037.44 ; U1.AB12@1111.81,2037.44 U1.AB12@1115.42,2037.44 ; U1.AB12@1116.05,2037.44 U1.AB12@1115.42,2037.44
  Top Layer w5: v1@434.81,2296.7 U3.M3@456.01,2317.91
  L3_INT_1 w4.5: v1(431.58,2297.67) 431.58,2310.79 435.65,2314.86 443.16,2314.86 447.23,2310.79 447.23,2283.68 439.24,2275.69 439.24,2141.47 416.99,2119.22 416.99,2054.33 v1(423.05,2048.27) 416.99,2042.21 416.99,2007.67 450.77,1973.89 450.77,1947.25 455.39,1942.63 455.39,1866.17 446.16,1856.94 446.16,1769.95 ; 446.13,1769.92 v1(452.47,1763.58)
  L6_INT_2 w4.5: v1@424.72,2052.37 437.62,2052.37 445.62,2060.37 493.49,2060.37 518.52,2085.4 788.54,2085.4 788.62,2085.48 799.77,2085.48 810.23,2075.02 880.4,2075.02 902.98,2052.44 ; 903.19,2052.44 934.75,2020.88 1022.32,2020.88 1029.41,2013.79 1052.2,2013.79 1064.1,2001.89 1078.04,2001.89 1098.54,2022.39 v1(1100.37,2022.39)
DRAM_SDCKE0: R635.2 U1.Y11 U3.K9 U5.K9 | length 1919
  Top Layer w4.5: v7(510.41,1577.24) 522.01,1588.84 U5.K9@522.01,1598.93 ; U1.Y11@1179.05,2068.94 1179.05,2069.6 v1@1192.32,2082.87
  Top Layer w4.7: v1(509.95,1880.82) 572.45,1943.32 817.13,1943.32 ; 817.14,1943.33 870.78,1943.33 889.6,1924.51 889.6,1917.99 903.28,1904.3 907.86,1899.72 914.39,1899.72 1001.95,1812.16 1001.95,1783.81 1015.54,1770.22 1153.87,1770.22 1163.57,1779.92 1163.57,1816.17 ; 1163.37,1816.37 v1@1163.37,1859
  Top Layer w5: v7@503.26,2144.68 U3.K9@519.01,2128.93
  L3_INT_1 w4.5: v7(503.26,2145.7) 511.8,2137.16 511.8,2019.07 529.29,2001.58 529.29,1961.23 516.54,1948.48 507.3,1948.48 501.24,1942.42 501.24,1937.74 505.47,1933.51 525.49,1933.51 531.09,1927.91 531.09,1921.71 526.99,1917.62 523.38,1917.62 519.33,1913.57 519.33,1906.3 509.95,1896.92 v1(509.95,1880.82) 509.95,1875.15 480.84,1846.04 480.84,1819.9 487.49,1813.25 487.49,1727.48 506.98,1707.99 506.98,1685.9 526.7,1666.18 526.7,1593.53 v7(510.41,1577.24)
  L6_INT_2 w4.5: v1(1163,1863.91) 1171.97,1863.91 1255.15,1947.09 1255.15,1995.02 1237.87,2012.3 1237.87,2039.03 v1(1194.02,2082.88)
  Bottom Layer w4.5: v7(503.26,2145.7) v7@504.88,2144.08
  Bottom Layer w6: R635.2@504.88,2106.9 v7@504.88,2144.08
DRAM_SDCLK1: R43.2 U1.AD14 U3.J7 U5.J7 | length 1600
  Top Layer w3.7: U3.J7@550.5,2191.92 540.74,2201.69 540.74,2214.42 546.26,2219.94 587.11,2219.94 600.46,2233.29 600.46,2244.57 v7(609.89,2254) ; v7(551.32,1697.4) 554.67,1700.75 562.48,1700.75 567.81,1695.42 567.81,1691.03 559.43,1682.65 559.43,1676.86 571.26,1665.03 571.26,1649.36 566.39,1644.49 559.21,1644.49 553.5,1650.2 U5.J7@553.5,1661.92 U5.J7@553.5,1663.41 ; v1@668.58,1982.09 663.96,1986.71 663.96,1992.12 669.14,1997.3 887.67,1997.3 899.62,2009.25 899.62,2048.29 901.53,2050.2 911.4,2050.2 913.32,2048.29 913.32,2004.43 920.44,1997.3 956.05,1997.3 995.53,1957.82 1049.27,1957.82 1055.22,1963.77 1055.22,1970.01 1053.06,1972.17 U1.AD14@1053.06,1974.45
  L3_INT_1 w3.7: v1@671.4,2019.44 664.37,2012.41 664.37,1987.05 v1(672.35,1980.12)
  Bottom Layer w3.7: v7(551.32,1697.4) 551.32,1704.51 544.53,1711.3 544.53,1718.42 577.81,1751.7 577.81,1813.65 614.55,1850.39 614.55,1937.7 627.09,1950.24 652.82,1950.24 665.84,1963.26 665.84,1971.34 672.35,1977.85 v1(672.35,1980.12) 672.35,1989.83 676.16,1993.64 715.71,1993.64 734.22,2012.15 734.22,2063.21 702.32,2095.11 691.61,2095.11 658.37,2128.36 658.37,2219.46 640.08,2237.75 615.15,2237.75 609.89,2243.01 v7(609.89,2254) ; v1@673.74,2020.45 664.97,2029.22 664.97,2035.81 R43.2@686.06,2056.9
  other v1: 673.91,2020.62
DRAM_SDCLK1_B: R43.1 U1.AE14 U3.K7 U5.K7 | length 1599.4
  Top Layer w3.7: U3.K7@519.01,2191.92 525.01,2185.92 529.28,2185.92 531.74,2188.38 531.74,2218.15 542.53,2228.94 583.38,2228.94 591.46,2237.02 591.46,2248.71 v7(584.04,2256.13) ; U5.K7@522.01,1661.92 522.01,1648.9 533.02,1637.89 540.71,1637.89 544.92,1642.1 544.92,1647.84 537.88,1654.88 537.93,1654.88 537.93,1666.25 533.42,1670.76 533.42,1690.98 v7(526.86,1697.54) ; v1@649.62,1981.56 652.85,1984.79 652.85,1993.74 665.31,2006.2 884.42,2006.2 890.72,2012.5 890.72,2051.97 897.84,2059.1 915.09,2059.1 922.22,2051.97 922.22,2008.11 924.13,2006.2 959.88,2006.2 998.88,1967.2 1014.31,1967.2 U1.AE14@1021.57,1974.45
  L3_INT_1 w3.7: v1(648.96,1980.3) 655.78,1987.12 655.78,2014.12 v1(649.76,2020.14)
  Bottom Layer w3.7: v7(526.86,1697.54) 526.86,1700.88 535.96,1709.98 535.96,1718.54 535.65,1718.54 535.53,1718.42 535.53,1722.15 568.81,1755.43 568.81,1817.38 605.97,1854.54 605.97,1941.85 623.36,1959.24 649.09,1959.24 656.84,1966.99 656.84,1973.07 649.61,1980.3 v1(648.96,1980.3) 650.24,1982.07 670.81,2002.64 711.98,2002.64 725.22,2015.88 725.22,2059.48 698.59,2086.11 687.89,2086.11 649.37,2124.63 649.37,2215.73 636.35,2228.75 611.42,2228.75 v7(584.04,2256.13) ; R43.1@634.88,2056.9 655.97,2035.81 655.97,2026.81 v1@650.06,2020.9
DRAM_SDODT0: U1.AC16 U3.K1 U5.K1 | length 1936.9
  Top Layer w4.5: U5.K1@522.01,1850.9 547.86,1876.75 v7(557.81,1876.75) ; v1@1069.64,1896.54 U1.AC16@1084.56,1911.46
  Top Layer w4.7: U3.K1@519.01,2380.9 v7@519.01,2397.83
  L3_INT_1 w4.5: v7(518.69,2403.43) 550.08,2372.04 550.08,2096.25 575.08,2071.25 ; v7(557.81,1876.75) 570.16,1889.1 582.74,1889.1 598.49,1873.35 598.49,1833.59 583.86,1818.96 583.86,1792.2 593.86,1782.2 607.22,1782.2 618.6,1793.58 618.6,1849.37 611.97,1856 611.97,1880.02 601.29,1890.7 601.29,1910.11 611.97,1920.79 611.97,1931.43 589.78,1953.62 589.78,2009.26 589.83,2009.31 589.83,2017.74 ; 575.11,2071.25 589.83,2056.53 589.83,2017.74 ; v1@889.76,1717.05 801.18,1628.47 720.2,1628.47 705.58,1643.09 705.74,1643.25 705.74,1688.73 668.76,1725.71 668.76,1772.62 646,1795.38 646,1891.85 632.26,1905.59 632.26,1999.21 613.73,2017.74 589.83,2017.74
  Bottom Layer w4.7: v1(893.11,1716.06) 893.11,1773.81 882.87,1784.05 882.87,1847.39 931.74,1896.26 1011.21,1896.26 1011.52,1895.95 1064.18,1895.95 1066.55,1893.58 1069.35,1896.38 v1(1069.35,1897.28)
DRAM_SDQS0: U1.AE3 U3.F3 | length 855.9
  Top Layer w3.7: U3.F3@644.99,2317.91 636.14,2317.91 633.18,2314.95 633.18,2305.52 634.8,2303.9 649.28,2303.9 652.05,2301.13 652.05,2294.33 649.39,2291.67 637.65,2291.67 633.18,2287.2 633.18,2277.96 652.15,2258.99 662.14,2258.99 664.04,2260.89 664.04,2271.81 671.22,2278.99 688.56,2278.99 695.74,2271.81 695.74,2240.89 697.64,2238.99 707.54,2238.99 709.44,2240.89 709.44,2271.81 716.62,2278.99 733.96,2278.99 741.14,2271.81 741.14,2240.89 743.04,2238.99 752.94,2238.99 754.84,2240.89 754.84,2271.81 762.02,2278.99 779.36,2278.99 786.54,2271.81 786.54,2240.89 788.44,2238.99 798.34,2238.99 800.24,2240.89 800.24,2271.81 807.42,2278.99 824.76,2278.99 831.94,2271.81 831.94,2240.89 833.84,2238.99 843.74,2238.99 845.64,2240.89 845.64,2271.81 852.82,2278.99 870.16,2278.99 877.34,2271.81 877.34,2240.89 879.24,2238.99 889.61,2238.99 929.64,2279.02 953.92,2279.02 982.31,2307.41 982.31,2312.32 978.9,2315.73 978.9,2322.29 982.84,2326.23 1003.62,2326.23 1008.94,2320.91 U1.AE3@1021.57,2320.91
DRAM_SDQS0_B: U1.AD3 U3.G3 | length 856.9
  Top Layer w3.7: U3.G3@613.49,2317.91 622.35,2317.91 624.18,2316.08 624.18,2274.23 648.42,2249.99 665.86,2249.99 673.04,2257.17 673.04,2268.09 674.94,2269.99 684.84,2269.99 686.74,2268.09 686.74,2237.17 693.92,2229.99 711.26,2229.99 718.44,2237.17 718.44,2268.09 720.34,2269.99 730.24,2269.99 732.14,2268.09 732.14,2237.17 739.32,2229.99 756.66,2229.99 763.84,2237.17 763.84,2268.09 765.74,2269.99 775.64,2269.99 777.54,2268.09 777.54,2237.17 784.72,2229.99 802.06,2229.99 809.24,2237.17 809.24,2268.09 811.14,2269.99 821.04,2269.99 822.94,2268.09 822.94,2237.17 830.12,2229.99 847.46,2229.99 854.64,2237.17 854.64,2268.09 856.54,2269.99 866.44,2269.99 868.34,2268.09 868.34,2237.17 875.52,2229.99 893.34,2229.99 933.61,2270.27 933.61,2270.56 958.19,2270.56 993.93,2306.3 1038.45,2306.3 U1.AD3@1053.06,2320.91
DRAM_SDQS1: U1.AD6 U3.C7 | length 827.5
  Top Layer w3.7: U3.C7@739.48,2191.92 748.33,2191.92 751.34,2194.93 751.34,2208.97 762.58,2220.21 768.07,2220.21 ; 765.35,2220.21 768.07,2220.21 ; 1000.49,2216.2 977.33,2193.04 977.33,2138.38 931.18,2092.23 915.28,2092.23 906.75,2100.76 906.75,2120.45 911.92,2125.62 948.45,2125.62 958.98,2136.15 958.98,2156.43 949.16,2166.25 916.45,2166.25 911.68,2171.02 911.68,2184.8 921.38,2194.5 960.5,2194.5 987,2221 987,2240.75 968.89,2258.86 939.75,2258.86 901.1,2220.21 768.07,2220.21 ; 1000.79,2216.37 1003.89,2219.46 1003.89,2232.98 1012.93,2242.02 1037.46,2242.02 U1.AD6@1053.06,2226.42
DRAM_SDQS1_B: U1.AE6 U3.B7 | length 827.7
  Top Layer w3.7: U3.B7@770.97,2191.92 763.04,2191.92 760.34,2194.62 760.34,2205.24 765.69,2210.59 777.2,2210.59 779.48,2208.31 779.48,2202.97 783.77,2198.68 788.42,2198.68 800.95,2211.21 904.83,2211.21 943.48,2249.86 965.16,2249.86 978,2237.02 978,2224.73 956.77,2203.5 917.65,2203.5 902.68,2188.53 902.68,2167.29 912.72,2157.25 945.43,2157.25 949.98,2152.7 949.98,2139.88 944.72,2134.62 908.19,2134.62 897.75,2124.18 897.75,2097.03 911.55,2083.23 934.91,2083.23 986.4,2134.72 986.4,2158.36 986.33,2158.43 986.33,2189.31 1006.95,2209.93 1028.59,2209.93 1033.7,2204.82 1039.93,2204.82 1042.71,2207.6 1042.71,2215.6 1031.89,2226.42 U1.AE6@1021.57,2226.42 U1.AE6@1021.9,2225.26 ; U1.AE6@1021.15,2226.01 U1.AE6@1021.9,2225.26 ; U1.AE6@1021.98,2224.79 1021.98,2224.97 U1.AE6@1021.9,2225.26 ; U1.AE6@1021.97,2225.19 U1.AE6@1021.9,2225.26
DRAM_SDQS2: U1.AD8 U5.C7 | length 961.2
  Top Layer w3.7: U5.C7@742.48,1661.92 742.48,1671.18 742.87,1671.57 v1(742.87,1683.43) ; v1@1038.98,2149.35 U1.AD8@1053.06,2163.43
  L3_INT_1 w3.8: v1(742.87,1683.43) 739,1679.56 726.96,1679.56 720.89,1685.63 720.89,1693.53 731.06,1703.7 731.06,1709.66 725.51,1715.21 721.61,1715.21 711.37,1704.97 707.47,1704.97 701.61,1710.82 701.61,1714.73 711.85,1724.97 711.85,1728.87 706,1734.72 702.09,1734.72 691.85,1724.48 687.95,1724.48 682.1,1730.34 682.1,1734.24 692.34,1744.48 692.34,1748.38 677.61,1763.11 677.61,1776.29 677.52,1776.38 677.52,1951.26 693.07,1966.81 693.07,1967.03 726.78,2000.74 748.33,2000.74 766.65,1982.41 769.38,1982.41 776.41,1989.45 776.41,1992.17 762.76,2005.83 762.76,2016.01 775.07,2028.32 785.24,2028.32 798.9,2014.66 801.62,2014.66 808.66,2021.7 808.66,2024.42 798.74,2034.33 798.74,2051.99 807.18,2060.43 865.3,2060.43 947.72,2142.85 1031.51,2142.85 v1(1037.05,2148.39)
DRAM_SDQS2_B: U1.AE8 U5.B7 | length 961.4
  Top Layer w3.7: U5.B7@773.97,1661.92 773.97,1681.55 v1(775.16,1682.74) ; v1@1006.97,2163.43 U1.AE8@1021.57,2163.43
  L3_INT_1 w3.8: v1@773.97,1681.55 762.27,1693.26 762.27,1704.21 741.37,1725.11 729.55,1725.11 720.95,1733.71 720.85,1733.71 686.61,1767.95 686.61,1780.01 686.52,1780.1 686.52,1947.53 702.07,1963.08 702.07,1963.3 730.51,1991.74 744.6,1991.74 762.93,1973.41 773.1,1973.41 785.41,1985.72 785.41,1995.9 771.76,2009.56 771.76,2012.28 778.79,2019.32 781.51,2019.32 795.17,2005.66 805.35,2005.66 817.66,2017.97 817.66,2028.15 807.74,2038.06 807.74,2048.26 810.86,2051.38 868.98,2051.38 951.45,2133.85 1042.45,2133.85 1052.74,2144.14 1052.74,2160.15 1047.12,2165.77 1009.65,2165.77 v1(1003.35,2159.47)
  Bottom Layer w3.7: v1(1003.35,2159.47) v1@1006.89,2163.01
DRAM_SDQS3: U1.AC10 U5.F3 | length 806.5
  Top Layer w3.7: v1@647.99,1769.94 U5.F3@647.99,1787.91 ; v1@1068.44,2085.54 U1.AC10@1084.56,2100.44
  Bottom Layer w3.7: 635.92,1805.72 636.04,1805.84 ; v1(647.82,1767.92) 645.55,1767.92 636.04,1777.43 636.04,1805.84 ; 758.69,1990.07 745.41,1976.79 696.33,1927.7 660.28,1891.66 660.28,1855.48 636.04,1831.24 636.04,1805.84 ; 758.7,1990.07 786.99,2018.37 800.27,2031.65 800.27,2051.87 809.58,2061.18 809.58,2071.32 798.04,2082.86 798.04,2084.92 805.66,2092.55 807.72,2092.55 819.26,2081.01 829.41,2081.01 867.45,2119.05 917.27,2119.05 917.31,2119.01 940.39,2119.01 945.37,2123.99 957.25,2123.99 967.82,2113.42 1037.71,2113.42 1055.15,2095.98 1055.15,2075.29 1060.52,2069.92 1077.35,2069.92 1082.73,2075.3 1082.73,2078.89 1077.03,2084.59 v1(1069.32,2084.59)
DRAM_SDQS3_B: U1.AB10 U5.G3 | length 806.1
  Top Layer w3.7: v1@616.49,1771.34 U5.G3@616.49,1787.91 ; v1@1101.3,2085.69 U1.AB10@1116.05,2100.44
  Bottom Layer w3.7: v1(615.96,1768.42) 618.03,1768.42 627.04,1777.43 627.04,1834.97 651.6,1859.53 651.6,1879.14 651.28,1879.46 651.28,1895.38 692.6,1936.7 736.41,1980.52 754.97,1999.07 777.99,2022.09 791.27,2035.38 791.27,2055.6 800.58,2064.9 800.58,2067.6 789.04,2079.14 789.04,2088.65 801.94,2101.55 811.45,2101.55 822.99,2090.01 825.68,2090.01 863.72,2128.05 921,2128.05 921.11,2127.94 936.59,2127.94 937.96,2129.31 937.96,2129.47 941.48,2132.99 960.98,2132.99 969.65,2124.32 971.57,2122.42 1042.71,2122.42 1066.13,2099 1075.62,2099 1078.32,2096.3 1078.32,2096.15 1080.88,2093.59 1080.88,2093.47 1089.29,2085.06 v1(1101.83,2085.06) v1@1096.99,2085.06
DRAM_WE_B: U1.AB16 U3.L3 U5.L3 | length 1542.2
  Top Layer w4.7: v7@473.96,2331.46 U3.L3@487.51,2317.91 ; U5.L3@490.51,1787.91 490.51,1766.04 475.95,1751.48 460.78,1751.48 431.92,1722.62 431.92,1708.85 439.34,1701.43 507.57,1701.43 515.18,1709.04 515.18,1735.28 v7(508.19,1742.27) ; v1@1100.07,1895.48 U1.AB16@1116.05,1911.46
  L3_INT_1 w4.7: v7(472.97,2333.49) 521.23,2285.23 521.23,2022.87 539.11,2004.99 v1@539.11,1948.98 ; v7(508.19,1742.27) 496.89,1753.57 496.89,1820.71 491.51,1826.09 491.51,1842.44 524.16,1875.09 524.16,1890.69 540.59,1907.12 v1@540.59,1946.21
  L6_INT_2 w4.5: v1(537.63,1947.5) 537.63,1945.73 581.18,1902.18 660.18,1902.18 664.76,1906.76 766.11,1906.76 784.95,1925.6 850.62,1925.6 882.02,1894.2 972.8,1894.2 ; 972.83,1894.23 990.35,1894.23 ; 990.38,1894.2 1006.75,1894.2 1024.83,1912.28 1079,1912.28 1095.91,1895.37 v1(1100.18,1895.37)
DS_CLK: R511.1 U1.C25 U51.7 | length 945.4
  Top Layer w5: U1.C25@1714.48,1628 1720.49,1628 1813.88,1534.61 1900.96,1534.61 v3(1901.47,1534.1)
  Top Layer w10: R511.1@1865.93,1003.9 1932.47,1003.9 U51.7@1971.47,964.9
  Bottom Layer w4.7: v3@1902.68,1534.28 1902.68,1033.69 U51.7@1971.47,964.9
DS_I/O: R512.1 U1.D25 U51.6 | length 1003.9
  Top Layer w5: v7@1667.59,1609.86 1682.98,1625.25 U1.D25@1682.98,1628
  Top Layer w10: R512.1@1868.93,1122.9 1913.47,1122.9 U51.6@1971.47,1064.9
  L6_INT_2 w5: v7(1667.07,1609.97) 1734.22,1609.97 1749.81,1594.38 1749.81,1591.88 2053.8,1287.89 2053.8,1253.73 2011.3,1211.23 1952.32,1211.23 1923.67,1182.58 1923.67,1112.7 U51.6@1971.47,1064.9
DS_RST: R513.1 U1.D24 U51.5 | length 882.4
  Top Layer w5: U1.D24@1682.98,1659.49 1690.58,1659.49 1707.11,1642.96 v11@1727.95,1642.96
  Top Layer w10: R513.1@1871.93,1258.9 1877.47,1258.9 U51.5@1971.47,1164.9
  L6_INT_2 w5: v11(1730.65,1644.29) 1731.13,1644.29 1731.33,1644.49 1731.33,1644.15 1731.6,1643.88 1731.6,1643.75 1730.77,1642.92 1745.11,1642.92 1768.42,1619.61 1768.42,1592.66 2065.67,1295.41 2065.67,1248.53 1982.04,1164.9 U51.5@1971.47,1164.9 ; U51.5@1952.47,1165.9 U51.5@1971.47,1165.9
EIM_DA0: R702.2 RN503.1 | length 117.8
  Bottom Layer w4.7: R702.2@2431.06,2789.9 2497.27,2856.11 RN503.1@2497.27,2880.3
EIM_DA1: R701.2 RN503.2 | length 98.1
  Bottom Layer w4.7: R701.2@2431.06,2846.9 2433.22,2846.9 2464.88,2878.56 2464.88,2889.36 2480.43,2904.91 2493.48,2904.91 RN503.2@2497.27,2908.7
EIM_DA2: R700.2 RN503.3 | length 73.2
  Bottom Layer w10: R700.2@2436.06,2962.9 2446.79,2962.9 2475.79,2933.9 RN503.3@2497.27,2933.9
EIM_DA3: R699.2 RN503.4 | length 261.3
  Top Layer w10: v1(2310.86,2919.19) 2310.86,2879.1 R699.2@2313.06,2876.9
  L6_INT_2 w10: v1@2311.77,2919.34 2367.1,2974.67 2466.05,2974.67 2466.33,2974.39 v1(2466.33,2972.82)
  Bottom Layer w10: v1@2464.15,2973.15 2478.2,2959.1 RN503.4@2497.27,2959.1
EIM_DA4: R690.2 RN503.6 SW6.5 | length 289
  Top Layer w10: v1@2348.66,2995.72 2353.68,2990.7 SW6.5@2384.47,2990.7 2570.98,2990.7 v1@2571.89,2989.79
  Bottom Layer w10: v1@2350.59,2996.62 2358.87,3004.9 R690.2@2383.88,3004.9 ; RN503.6@2547.67,2987.5 2571.7,2987.5 v1(2573.53,2989.33)
  other v1: 2347.82,2997.48
EIM_DA5: R691.2 RN503.7 SW6.6 | length 362.7
  Top Layer w10: v1(2337.76,2910.85) 2367.61,2940.7 SW6.6@2384.47,2940.7 2398.21,2954.44 2585.58,2954.44 v1@2590.22,2959.08
  Bottom Layer w10: v1@2337.9,2911.96 2346.96,2902.9 R691.2@2380.88,2902.9 ; RN503.7@2547.67,2959.1 2589.99,2959.1 v1(2590.85,2958.24)
EIM_DA6: R692.2 RN503.8 SW6.7 | length 516.8
  Top Layer w4.7: v1(2296.75,2828.69) 2315.88,2828.69 2377.89,2890.7 SW6.7@2384.47,2890.7
  Top Layer w10: SW6.7@2384.47,2890.7 2542.23,2890.7 v1@2583.1,2931.57
  Bottom Layer w4.7: v1@2297.66,2829.95 2297.66,2780.6 2344.36,2733.9 R692.2@2379.88,2733.9
  Bottom Layer w10: RN503.8@2547.67,2933.9 2583.6,2933.9 v1(2584.27,2933.23)
EIM_DA7: R693.2 RN503.9 SW6.8 | length 525.3
  Top Layer w10: v1@2328.89,2678.4 2328.89,2680.58 2399.45,2751.14 2399.45,2825.72 SW6.8@2384.47,2840.7 2523.39,2840.7 v1@2588.58,2905.89
  Bottom Layer w10: v1(2327.11,2678.39) 2327.6,2677.9 R693.2@2380.88,2677.9 ; RN503.9@2547.67,2908.7 2586.42,2908.7 v1(2589.04,2906.08)
EIM_DA8: R698.2 RN502.1 | length 64.5
  Bottom Layer w10: R698.2@2436.06,3090.9 2499.67,3090.9 RN502.1@2500.27,3090.3
EIM_DA9: R697.2 RN502.2 | length 70.3
  Bottom Layer w10: R697.2@2437.06,3135.9 2454.26,3118.7 RN502.2@2500.27,3118.7
EIM_DA10: R696.2 RN502.3 | length 80.2
  Bottom Layer w10: R696.2@2437.06,3184.9 2478.06,3143.9 RN502.3@2500.27,3143.9
EIM_DA11: R686.2 RN502.4 SW6.1 | length 475.3
  Top Layer w10: v1(2326.65,3174.21) 2343.54,3191.1 SW6.1@2384.47,3191.1 2461.17,3191.1 v1@2472.82,3179.45
  Bottom Layer w10: v1(2326.65,3174.21) 2314.04,3174.21 2292.66,3195.59 2292.66,3255.21 2354.39,3316.94 2409.02,3316.94 R686.2@2438.06,3287.9 ; v1(2472.05,3177.83) 2480.78,3169.1 RN502.4@2500.27,3169.1
EIM_DA12: R687.2 RN502.6 SW6.2 | length 365
  Top Layer w10: SW6.2@2384.47,3141.1 2502.83,3141.1 2533.91,3172.18 2533.91,3229.29 v1(2537.31,3232.57)
  Bottom Layer w10: R687.2@2438.06,3235.9 2533.41,3235.9 2542.88,3226.43 2542.88,3205.29 RN502.6@2550.67,3197.5
EIM_DA13: R688.2 RN502.7 SW6.3 | length 342.8
  Top Layer w10: v1@2349.11,3060.01 2380.2,3091.1 SW6.3@2384.47,3091.1 2498.58,3091.1 v1(2578.7,3171.22)
  Bottom Layer w4.7: v1@2349.64,3058.22 2359.96,3047.9 R688.2@2383.88,3047.9
  Bottom Layer w10: RN502.7@2550.67,3169.1 2577.92,3169.1 v1@2578.9,3170.08
  other v1: 2348.8,3059.91
EIM_DA14: R689.2 RN502.8 SW6.4 | length 388.1
  Top Layer w10: SW6.4@2384.47,3041.1 2480.85,3041.1 2606.63,3166.88 v1@2629.01,3166.88
  Bottom Layer w10: RN502.8@2550.67,3143.9 2551.67,3142.9 R689.2@2607.88,3142.9 2607.88,3147.95 v1(2628.21,3168.28)
EIM_DA15: R695.2 RN502.9 | length 66.5
  Bottom Layer w10: RN502.9@2550.67,3118.7 2574.15,3118.7 2598.95,3093.9 R695.2@2606.88,3093.9